# Altium PCB JacdacNRF52833HighPower 32.PcbDoc (part 1 of 2)
Units mil, origin at the board's own origin, x right, y up, seen from the top; angles counter-clockwise.
Board outline 1541.27 x 1415.28 mil, 2 copper layers (Top Layer, Bottom Layer), stack 60.044 mil thick; 63 components, 36 nets, 260 pads, 44 vias.
Unrouted connection lines stored in the file: 13.
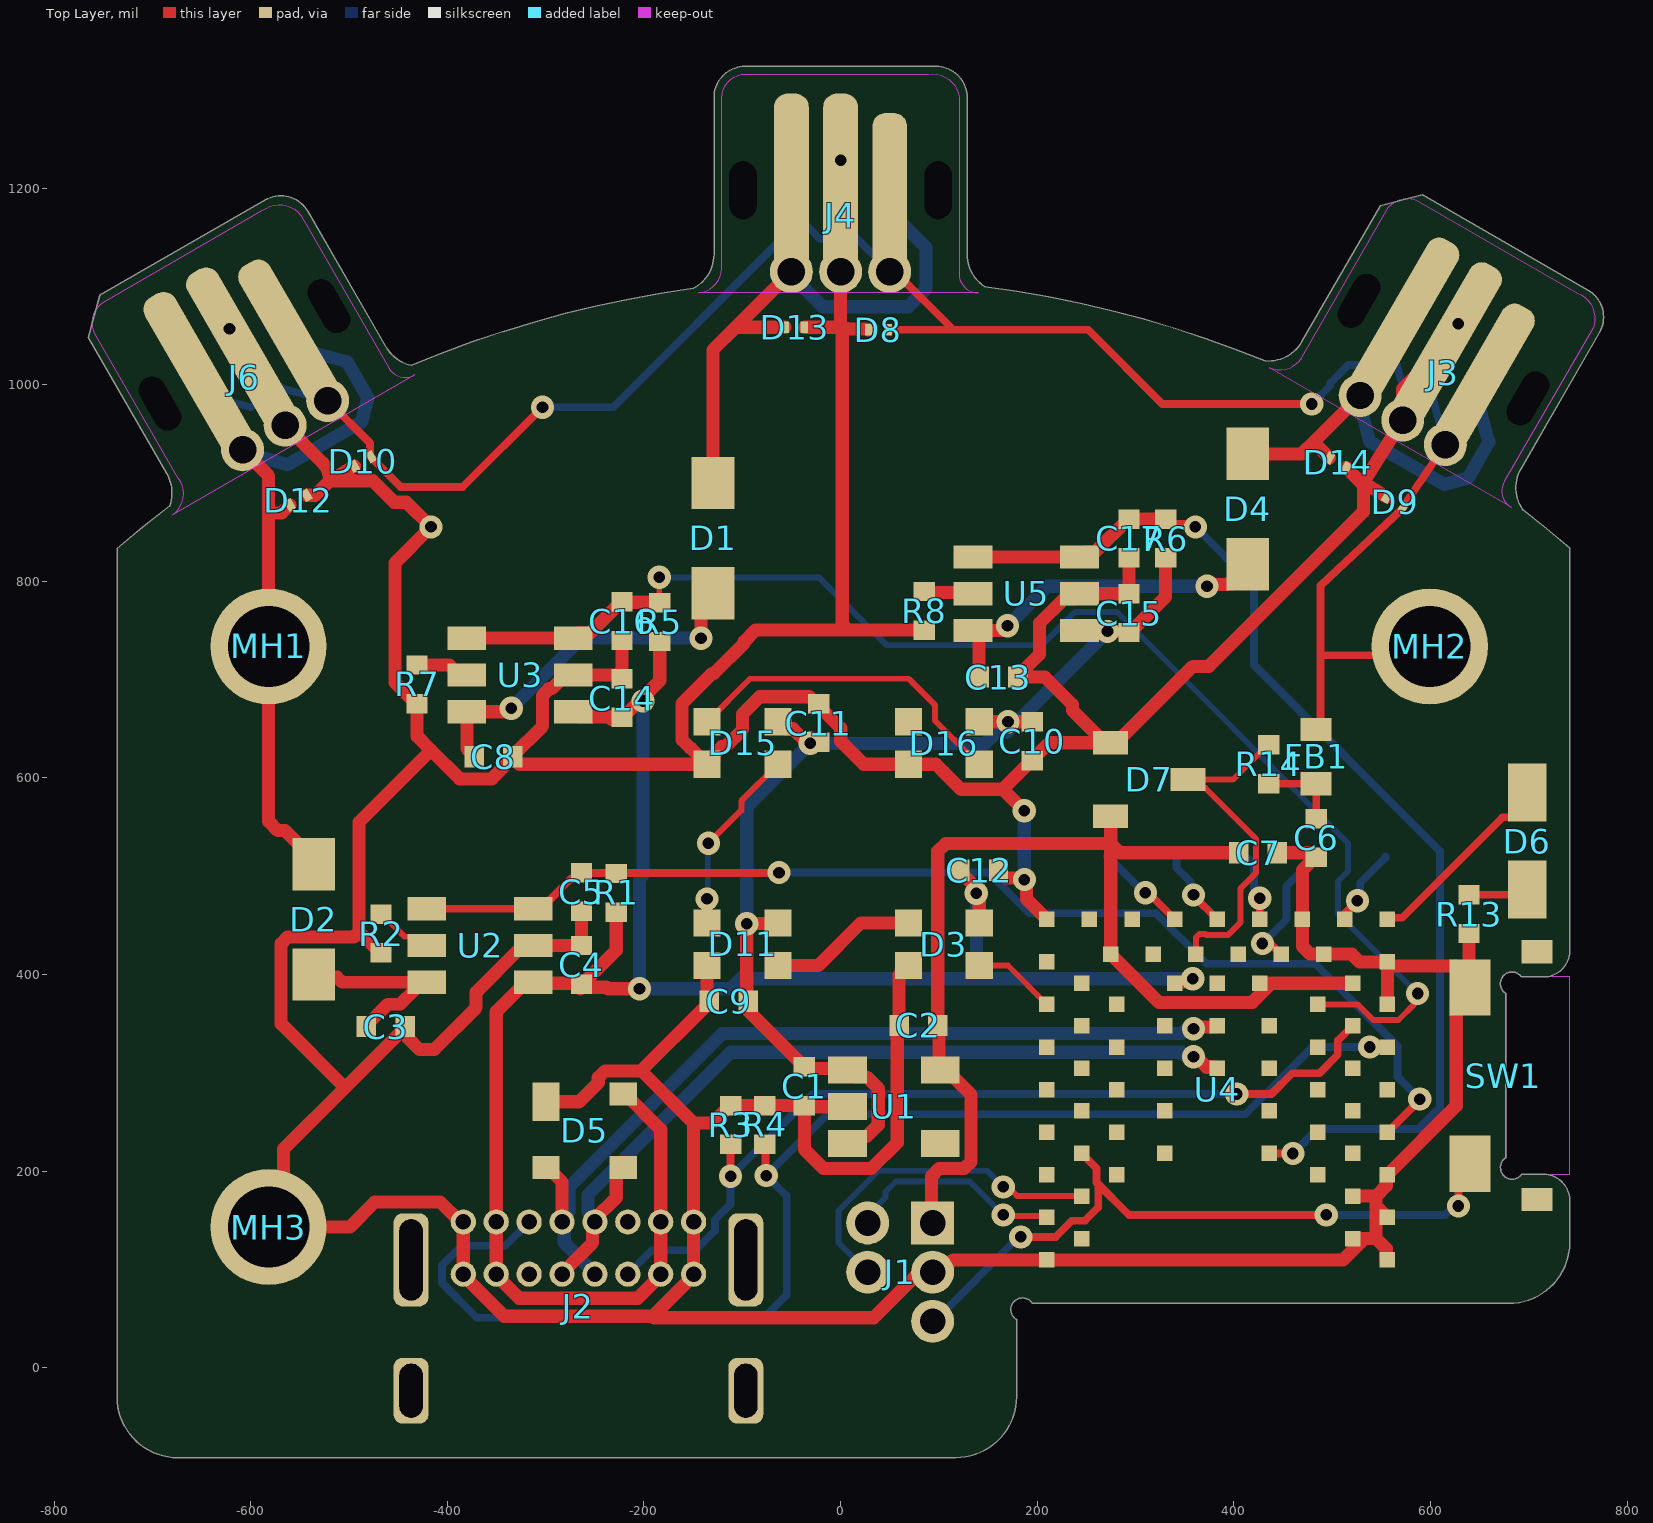
[diagram p0: Top Layer view]
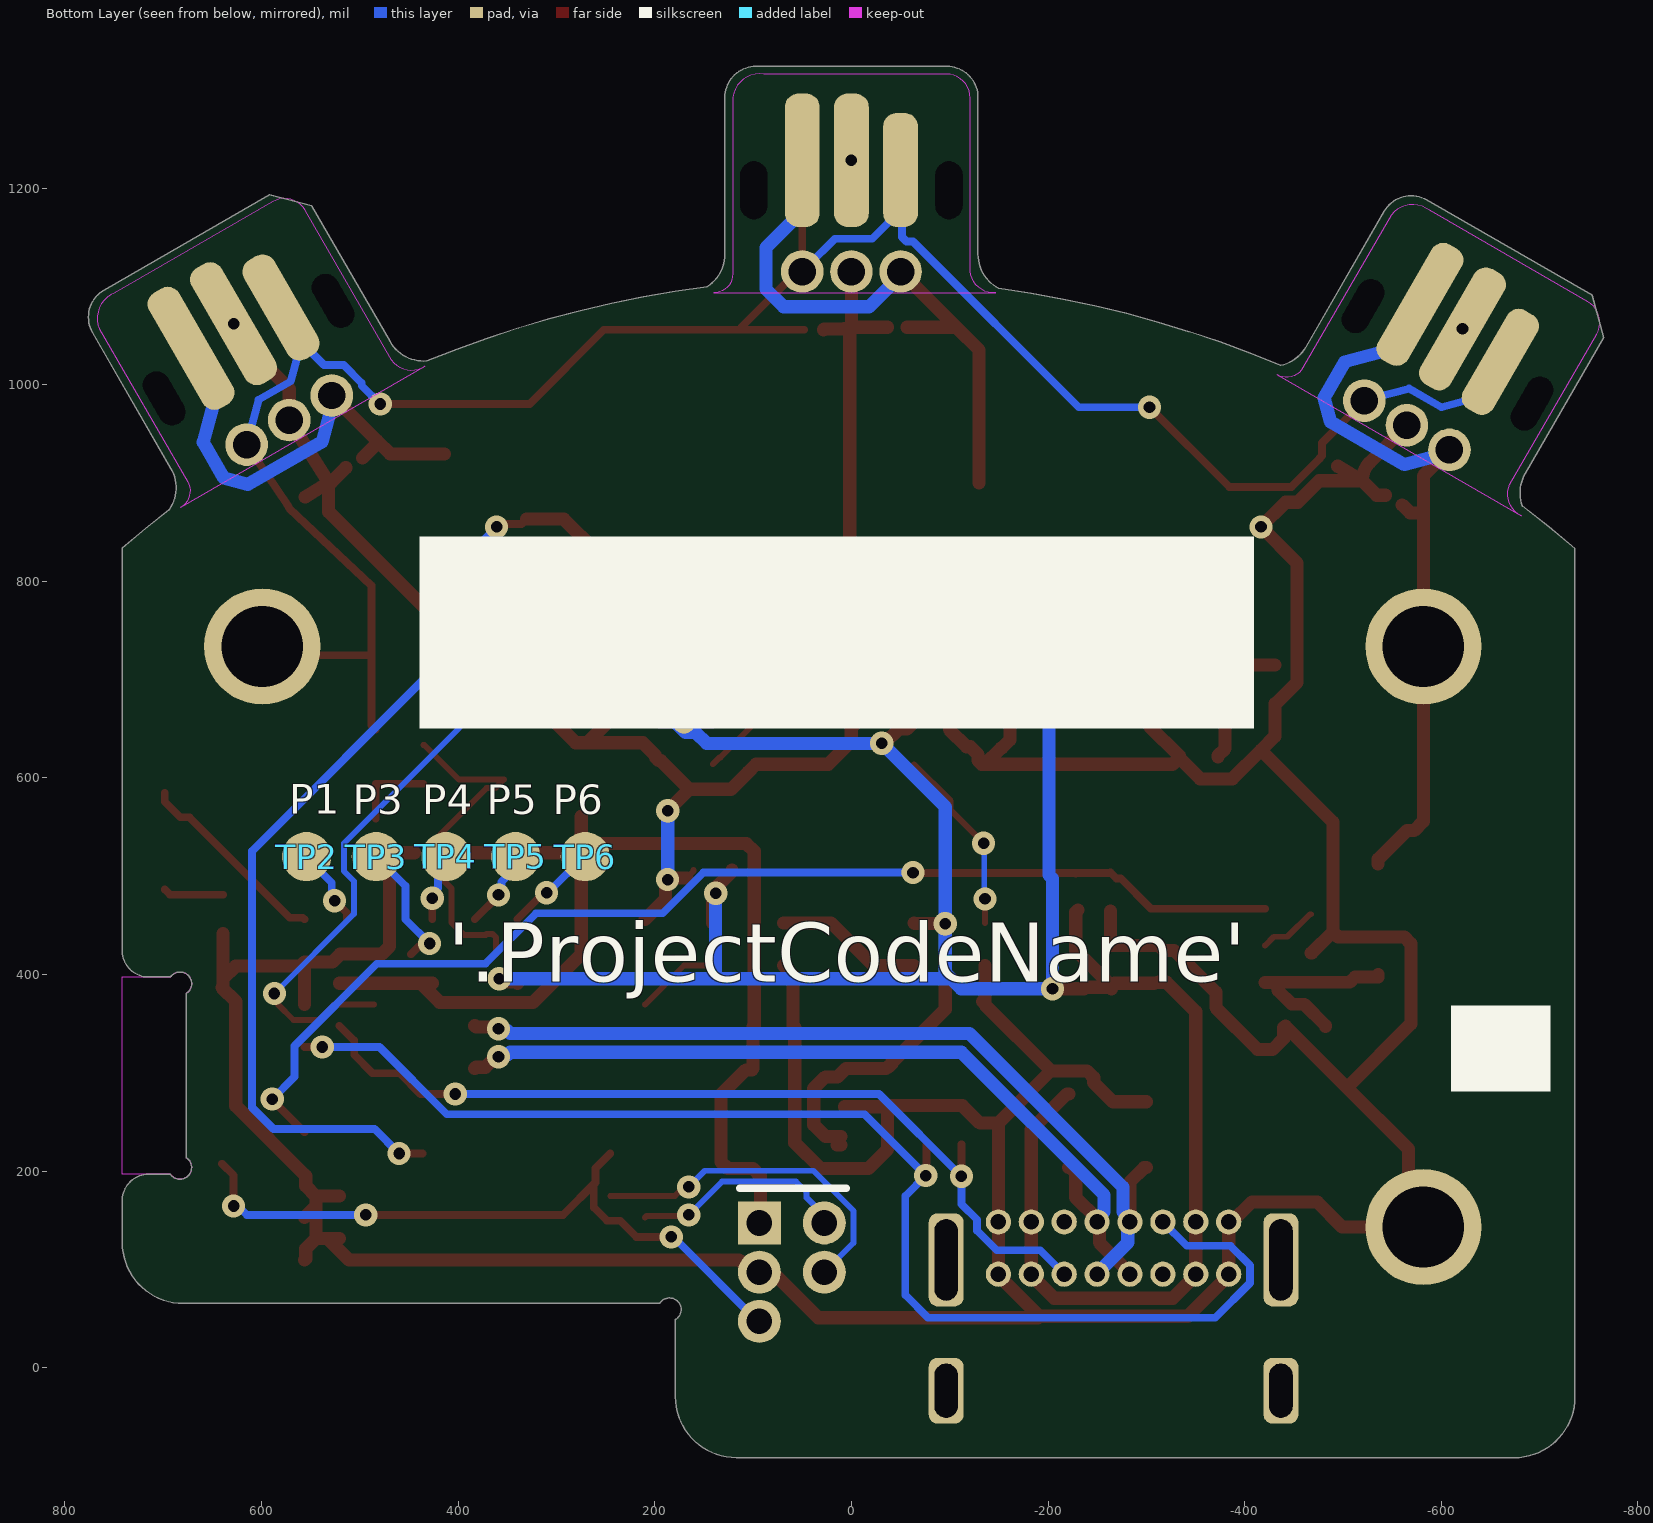
[diagram p1: Bottom Layer view, seen from below]

## Layer stack, top to bottom
Top Solder: solder mask 0.4, Solder Resist, Dk 3.5
Top Layer: signal copper 1.4
Dielectric 1: core 57.2441, FR-4, Dk 4.2
Bottom Layer: signal copper 1.4
Bottom Solder: solder mask 0.4, Solder Resist, Dk 3.5

## Board outline
-735.9,-29.68 -735.91,833.34 cw(c3.15,-26.26) -682.49,876.52 ccw(c-719.49,889.98) -685.39,909.68 -765.11,1047.76 -753.59,1090.79 -585.15,1188.03 cw(c-569.41,1160.75) -542.13,1176.5 -462.41,1038.42 ccw(c-428.31,1058.1) -436.5,1019.59 cw(c2.2,-22.8) -149.93,1097.86 ccw(c-168.12,1132.79) -128.74,1132.8 -128.74,1292.24 cw(c-97.24,1292.24) -97.24,1323.74 97.24,1323.74 cw(c97.24,1292.24) 128.74,1292.24 128.74,1132.8 ccw(c168.11,1132.8) 146.67,1099.78 cw(c1.61,-21.91) 431.7,1024.15 ccw(c435.13,1063.37) 469.22,1043.69 548.95,1181.78 591.97,1193.3 760.4,1096.06 cw(c744.65,1068.78) 771.93,1053.04 692.21,914.95 ccw(c726.3,895.26) 694.05,872.68 cw(c3.29,-22.37) 741.66,833.83 741.65,427.55 cw(c714.74,424.52) 717.78,397.6 692.6,397.5 ccw(c682.93,390.74) 676.67,380.75 676.72,213.69 ccw(c683.07,203.65) 692.83,196.9 717.78,196.71 cw(c714.76,169.79) 741.68,166.76 741.68,127.35 cw(c679.83,127.35) 679.83,65.51 195.02,65.51 ccw(c185.02,59.2) 178.28,49.49 179.04,49.49 179.04,-29.53 cw(c117.19,-29.53) 117.19,-91.38 -674.06,-91.54 cw(c-674.05,-29.69)

## Design rules (kind name [scope] priority, off if disabled: settings)
AssemblyTestPointUsage [All] p1: valid=2
BoardOutlineClearance [All] p1: gap=11.81 ignorepadtopadclearanceinfootprint=FALSE except(0: Arc-SplitContinuation Track-SplitContinuation SMDPad-OutlineEdge SMDPad-SplitContinuation THPad-OutlineEdge THPad-SplitContinuation Via-SplitContinuation Fill-SplitContinuation Poly-SplitContinuation Region-OutlineEdge Region-SplitContinuation Text-SplitContinuation; 7.87: Track-OutlineEdge Text-OutlineEdge)
Clearance [All] p1: gap=4.92 ignorepadtopadclearanceinfootprint=FALSE except(0: Arc-Hole Track-Hole SMDPad-Hole THPad-Hole Via-Hole Fill-Hole Poly-Hole Region-Hole Text-Hole)
ComponentClearance [All] p1: gap=7.87 collisioncheckmode=3 verticalgap=7.87 showdistances=FALSE
DiffPairsRouting [All] p1: maxlimit=78.74 minlimit=5.91 mostfreqgap=5.91 toplayer_minwidth=5.91 toplayer_maxwidth=78.74 toplayer_prefwidth=5.91 bottomlayer_minwidth=5.91 bottomlayer_maxwidth=78.74 bottomlayer_prefwidth=5.91 substack1={CB9D278B-8BF5-444A-AAF4-837A2A9DF42D} toplayer_{cb9d278b-8bf5-444a-aaf4-837a2a9df42d}_minwidth=15 toplayer_{cb9d278b-8bf5-444a-aaf4-837a2a9df42d}_maxwidth=15 toplayer_{cb9d278b-8bf5-444a-aaf4-837a2a9df42d}_prefwidth=15 bottomlayer_{cb9d278b-8bf5-444a-aaf4-837a2a9df42d}_minwidth=15 bottomlayer_{cb9d278b-8bf5-444a-aaf4-837a2a9df42d}_maxwidth=15 bottomlayer_{cb9d278b-8bf5-444a-aaf4-837a2a9df42d}_prefwidth=15 substack2={826B8647-A721-4255-895A-19F9591B9CD1} toplayer_{826b8647-a721-4255-895a-19f9591b9cd1}_minwidth=15 toplayer_{826b8647-a721-4255-895a-19f9591b9cd1}_maxwidth=15 toplayer_{826b8647-a721-4255-895a-19f9591b9cd1}_prefwidth=15 bottomlayer_{826b8647-a721-4255-895a-19f9591b9cd1}_minwidth=15 bottomlayer_{826b8647-a721-4255-895a-19f9591b9cd1}_maxwidth=15 bottomlayer_{826b8647-a721-4255-895a-19f9591b9cd1}_prefwidth=15 substack3={E64FCAF4-1BC8-437D-B1E0-0E5F2DC0F59E} toplayer_{e64fcaf4-1bc8-437d-b1e0-0e5f2dc0f59e}_minwidth=15 toplayer_{e64fcaf4-1bc8-437d-b1e0-0e5f2dc0f59e}_maxwidth=15 toplayer_{e64fcaf4-1bc8-437d-b1e0-0e5f2dc0f59e}_prefwidth=15 bottomlayer_{e64fcaf4-1bc8-437d-b1e0-0e5f2dc0f59e}_minwidth=15 bottomlayer_{e64fcaf4-1bc8-437d-b1e0-0e5f2dc0f59e}_maxwidth=15 bottomlayer_{e64fcaf4-1bc8-437d-b1e0-0e5f2dc0f59e}_prefwidth=15 substack4={E61CE66C-507C-4E1E-8E83-C905434AFC1C} toplayer_{e61ce66c-507c-4e1e-8e83-c905434afc1c}_minwidth=15 toplayer_{e61ce66c-507c-4e1e-8e83-c905434afc1c}_maxwidth=15 toplayer_{e61ce66c-507c-4e1e-8e83-c905434afc1c}_prefwidth=15 bottomlayer_{e61ce66c-507c-4e1e-8e83-c905434afc1c}_minwidth=15 bottomlayer_{e61ce66c-507c-4e1e-8e83-c905434afc1c}_maxwidth=15 bottomlayer_{e61ce66c-507c-4e1e-8e83-c905434afc1c}_prefwidth=15 maxuncoupledlength=984.25
FabricationTestPointUsage [All] p1: valid=2 allowmultiple=FALSE
HoleSize [All] p1: absolutevalues=TRUE maxlimit=100 minlimit=7.87 maxpercent=80.000 minpercent=20.000
MatchedLengths USB_DATA [InDifferentialPair('USB_D')] p1: tolerance=1000 checknetsindiffpair=FALSE checkdiffpairvsdiffpair=TRUE checkxsignals=TRUE checkothers=TRUE
MinimumSolderMaskSliver [All] p1: minsoldermaskwidth=0.2
PlaneClearance [All] p1: clearance=11.81
PlaneConnect [All] p1: planeconnectstyle=Relief reliefexpansion=19.68 reliefentries=4 reliefconductorwidth=7.87 reliefairgap=11.81
PolygonConnect "PolygonConnect GND" [isVIA] p1: connectstyle=Relief reliefconductorwidth=7.87 reliefentries=4 polygonreliefangle="90 Angle" airgapwidth=7.87
PolygonConnect [All] p2: connectstyle=Relief reliefconductorwidth=7.87 reliefentries=4 polygonreliefangle="90 Angle" airgapwidth=7.87
RoutingVias [All] p1: holewidth=11.81 width=23.62 viastyle="Through Hole" minholewidth=11.81 minwidth=23.62 maxholewidth=11.81 maxwidth=31.5
SignalStimulus "Schematic Signal Stimulus_1" [InNet('USB_D_P')] p1: kind=1 level=1 starttime=0.000 stoptime=500.0m periodtime=1.000
SignalStimulus "Schematic Signal Stimulus" [InNet('USB_D_N')] p2: kind=1 level=1 starttime=0.000 stoptime=41.67n periodtime=83.33n
SilkToSilkClearance [All] p1: silktosilkclearance=0.04
SilkToSolderMaskClearance [IsPad] p1: minsilkscreentomaskgap=1.97 clearancetoexposedcopper=TRUE
SolderMaskExpansion TENTED_VIA [IsVia] p1: expansion=4 istentingtop=TRUE
SolderMaskExpansion [All] p2: expansion=2.95 istentingtop=FALSE
Width [All] p1: maxlimit=78.74 minlimit=6 preferedwidth=6 substack1={CB9D278B-8BF5-444A-AAF4-837A2A9DF42D} toplayer_{cb9d278b-8bf5-444a-aaf4-837a2a9df42d}_minwidth=5.91 toplayer_{cb9d278b-8bf5-444a-aaf4-837a2a9df42d}_prefwidth=5.91 bottomlayer_{cb9d278b-8bf5-444a-aaf4-837a2a9df42d}_minwidth=5.91 bottomlayer_{cb9d278b-8bf5-444a-aaf4-837a2a9df42d}_prefwidth=5.91 substack2={826B8647-A721-4255-895A-19F9591B9CD1} toplayer_{826b8647-a721-4255-895a-19f9591b9cd1}_minwidth=5.91 toplayer_{826b8647-a721-4255-895a-19f9591b9cd1}_prefwidth=5.91 bottomlayer_{826b8647-a721-4255-895a-19f9591b9cd1}_minwidth=5.91 bottomlayer_{826b8647-a721-4255-895a-19f9591b9cd1}_prefwidth=5.91 substack3={E64FCAF4-1BC8-437D-B1E0-0E5F2DC0F59E} toplayer_{e64fcaf4-1bc8-437d-b1e0-0e5f2dc0f59e}_minwidth=5.91 toplayer_{e64fcaf4-1bc8-437d-b1e0-0e5f2dc0f59e}_prefwidth=5.91 bottomlayer_{e64fcaf4-1bc8-437d-b1e0-0e5f2dc0f59e}_minwidth=5.91 bottomlayer_{e64fcaf4-1bc8-437d-b1e0-0e5f2dc0f59e}_prefwidth=5.91 substack4={E61CE66C-507C-4E1E-8E83-C905434AFC1C} toplayer_{e61ce66c-507c-4e1e-8e83-c905434afc1c}_minwidth=5.91 toplayer_{e61ce66c-507c-4e1e-8e83-c905434afc1c}_prefwidth=5.91 bottomlayer_{e61ce66c-507c-4e1e-8e83-c905434afc1c}_minwidth=5.91 bottomlayer_{e61ce66c-507c-4e1e-8e83-c905434afc1c}_prefwidth=5.91 minimp=50.000000 maximp=50.000000 favimp=50.000000
20 further rules are at their usual default settings.

## Classes and differential pairs
differential pair USB_D: +USB_D_P -USB_D_N

## Components (designator, comment, footprint, x,y, rotation, side; value= is the part's Value field where it differs from the comment)
C1 "CL05A105KP5NNNC" "C0402_0.55MM - without outline" -36.86,286.36 r90 top
C2 "CL05A105KP5NNNC" "C0402_0.55MM - without outline" 79.23,348.22 r0 top
C3 "CL05A475MP5NRNC" "R0402 - Without outline" -462.62,347.07 r180 top
C4 "CL05A475MP5NRNC" "R0402 - Without outline" -263.64,409.88 r270 top
C5 "CL05A475MP5NRNC" "R0402 - Without outline" -263.64,483.99 r90 top
C6 "CL05C330JB51PNC" "C0402_0.55MM - without outline" 483.76,538.93 r90 top
C7 "CL05A475MP5NRNC" "R0402 - Without outline" 424.67,523.79 r180 top
C8 "CL05A475MP5NRNC" "R0402 - Without outline" -353.09,621.48 r180 top
C9 "CL05B104KP5NNNC" "C0402_0.55MM - without outline" -113.75,372.7 r0 top
C10 "CL05B104KP5NNNC" "C0402_0.55MM - without outline" 195.02,637.27 r90 top
C11 "CL05B104KP5NNNC" "C0402_0.55MM - without outline" -22.28,655.81 r270 top
C12 "CL05B104KP5NNNC" "C0402_0.55MM - without outline" 141.03,506.17 r180 top
C13 "CL05A475MP5NRNC" "R0402 - Without outline" 160.57,702.53 r180 top
C14 "CL05A475MP5NRNC" "R0402 - Without outline" -222.32,681.27 r270 top
C15 "CL05A475MP5NRNC" "R0402 - Without outline" 293.46,767.62 r270 top
C16 "CL05A475MP5NRNC" "R0402 - Without outline" -222.32,759.46 r90 top
C17 "CL05A475MP5NRNC" "R0402 - Without outline" 293.46,843.52 r90 top
D1 "MBR120VLSFT3G" MBR120VLSFT3G -129.76,843.82 r270 top
D2 "MBR120VLSFT3G" MBR120VLSFT3G -535.79,456.15 r270 top
D3 "WS2812B-2020" WS2812B-2020 105,430.77 r180 top
D4 "MBR120VLSFT3G" MBR120VLSFT3G 414.03,873.5 r270 top
D5 "NXP-PRTR5V0U2X,215-4-whitesch" NXP-SOT143B-4_V -260.47,241.05 r0 top
D6 "Right angle mount LED (orange)" LTST-S220KFKT 698.49,486.56 r0 top
D7 "BAT54S" NXP-BAT54S-TO-236AB 314.09,598.35 r0 top
D8 "VBUS05B1-SD0-G4-08" "0201-VBUS05B1-SD0-G4-08 - Without outline" 38.4,1055.78 r180 top
D9 "VBUS05B1-SD0-G4-08" "0201-VBUS05B1-SD0-G4-08 - Without outline" 564.09,880.71 r150 top
D10 "VBUS05B1-SD0-G4-08" "0201-VBUS05B1-SD0-G4-08 - Without outline" -486.22,921.88 r210 top
D11 "WS2812B-2020" WS2812B-2020 -99.72,430.77 r180 top
D12 "VBUS05B1-SD0-G4-08" "0201-VBUS05B1-SD0-G4-08 - Without outline" -551.66,882.61 r30 top
D13 "VBUS05B1-SD0-G4-08" "0201-VBUS05B1-SD0-G4-08 - Without outline" -46.7,1058.44 r0 top
D14 "VBUS05B1-SD0-G4-08" "0201-VBUS05B1-SD0-G4-08 - Without outline" 505.81,920.5 r330 top
D15 "WS2812B-2020" WS2812B-2020 -99.72,635.49 r180 top
D16 "WS2812B-2020" WS2812B-2020 105,635.49 r180 top
FB1 "TDK MPZ1608S102ATA00" "TDK MPZ1608 0.8mm - without outline" 483.76,621.56 r270 top
J1 "Hack Connect Mini 1.27 mm pitch 2-row" HACK_CONNECT_MINI_5_X_1_27 93.61,147.26 r180 top
J2 "USB4085-GF-A" USB4085-GF-A -266.61,95.17 r0 top
J3 "JACDAC edge connector" JACDAC_EDGE_CONNECTOR_0.2mm_T&G 561.03,945.22 r330 top
J4 "JACDAC edge connector" JACDAC_EDGE_CONNECTOR_0.2mm_T&G 0,1093.43 r0 top
J6 "JACDAC edge connector" JACDAC_EDGE_CONNECTOR_0.2mm_T&G -554.21,939.95 r30 top
MH1 "MH_5.0MMK_3.0MMC_2.1MMD_PTH" MH_5.0MMK_3.0MMC_2.1MMD_PTH -581.79,733.67 r90 top
MH2 "MH_5.0MMK_3.0MMC_2.1MMD_PTH" MH_5.0MMK_3.0MMC_2.1MMD_PTH 599.29,733.67 r90 top
MH3 "MH_5.0MMK_3.0MMC_2.1MMD_PTH" MH_5.0MMK_3.0MMC_2.1MMD_PTH -581.79,143.11 r270 top
R1 "" "R0402 - Without outline" -228.19,483.1 r90 top
R2 "0402 RES SMD 30k 1%" R0402 -467.44,441.67 r90 top
R3 "RC0402JR-075K1L" "R0402 - Without outline" -111.84,246.99 r90 top
R4 "RC0402JR-075K1L" "R0402 - WITHOUT OUTLINE" -77.17,246.99 r90 top
R5 "" "R0402 - WITHOUT OUTLINE" -183.91,758.48 r90 top
R6 "" "R0402 - Without outline" 330.67,843.49 r90 top
R7 "0402 RES SMD 30k 1%" R0402 -430.76,695.1 r90 top
R8 "0402 RES SMD 30k 1%" R0402 85.23,769.98 r90 top
R13 "RC0402FR-071KL" "R0402 - Without outline" 639.27,461.45 r90 top
R14 "RC0402FR-07220RL" "R0402 - Without outline" 435.5,613.86 r270 top
SW1 "Side mount digital switch." EVQ-P42B3M 741.68,297.11 r90 top
TP2 "TestPoint" Pad1.27mm 554.18,519.93 r180 bottom
TP3 "TestPoint" Pad1.27mm 483.31,519.93 r180 bottom
TP4 "TestPoint" Pad1.27mm 412.44,519.93 r180 bottom
TP5 "TestPoint" Pad1.27mm 341.58,519.93 r180 bottom
TP6 "TestPoint" Pad1.27mm 270.71,519.93 r180 bottom
U1 "LDO 3.3V/300 mA" ON_SEMI-SOT23-5 54.2,265.58 r0 top
U2 "TPS2553DBVR_ALT" TI-TPS2553 -366.71,429.57 r180 top
U3 "TPS2553DBVR_ALT" TI-TPS2553 -326,704.75 r180 top
U4 "Fanstel Nordic NRF52833 module" BM833 383.09,202.21 r180 top
U5 "TPS2553DBVR_ALT" TI-TPS2553 188.87,787.41 r180 top

## Footprints (in the part's own frame and the unit in brackets; to place one, negate y for a bottom-side part, rotate by r counter-clockwise, add the part's x,y. Pads: shape width x height; smd on the part's side, far side on the other; paste and mask are expansions set on the pad)
"0201-VBUS05B1-SD0-G4-08 - Without outline" [mm]
  rect 0.2x0.3 smd mask+0.05: 1(-0.25,0) 2(0.25,0)
  body extent -0.3,-0.15 0.3,0.15, height 0.22
BM833 [mm]
  rect 0.4x0.4 smd paste-0.254: 1(-4.4,2.35) 2(-3.5,1.8) 3(-4.4,1.25) 4(-3.5,0.7) 5(-4.4,0.15) 6(-3.5,-0.4) 7(-4.4,-0.95) 8(-3.5,-1.5) 9(-4.4,-2.05) 10(-3.5,-2.6) 11(-4.4,-3.15) 12(-3.5,-3.7) 13(-4.4,-4.25) 14(-3.5,-4.8) 15(-4.4,-5.35) 16(-4.4,-6.45) 17(-3.3,-6.45) 18(-2.75,-5.55) 19(-2.2,-6.45) 20(-1.65,-5.55) 21(-1.1,-6.45) 22(-0.55,-5.55) 23(0,-6.45) 24(0.55,-5.55) 25(1.1,-6.45) 26(1.65,-5.55) 27(2.2,-6.45) 28(2.75,-5.55) 29(3.3,-6.45) 30(4.4,-6.45) 31(4.4,-5.35) 32(3.5,-4.8) 33(4.4,-4.25) 34(3.5,-3.7) 35(4.4,-3.15) 36(3.5,-2.6) 37(4.4,-2.05) 38(3.5,-1.5) 39(4.4,-0.95) 40(3.5,-0.4) 41(4.4,0.15) 42(3.5,0.7) 43(4.4,1.25) 44(3.5,1.8) 45(4.4,2.35) 46(1.35,-0.4) 47(-1.35,-0.4) 48(-2.6,0.15) 49(-2.6,-0.95) 50(-1.35,-1.5) 51(-2.6,-2.05) 52(-1.35,-2.6) 53(-2.6,-3.15) 54(-1.35,-3.7) 55(-2.6,-4.25) 56(-1.1,-4.8) 57(0,-4.8) 58(1.1,-4.8) 59(2.6,-4.25) 60(1.35,-3.7) 61(2.6,-3.15) 62(1.35,-2.6) 63(2.6,-2.05) 64(1.35,-1.5) 65(2.6,-0.95) 66(2.6,0.15) 67(0,-3.7) 68(0,-2.6)
  body extent -5.1,-7.3 5.1,7.5, height 2
"C0402_0.55MM - without outline" [mm]
  rect 0.5x0.55 smd: 1(-0.5,0) 2(0.5,0)
  body extent -0.5,-0.25 0.5,0.25, height 0.55
EVQ-P42B3M [mm] "side mount tactile switch"
  rect 1.45x1.05 smd paste-0.254: 1(-2.275,2.575) 2(2.275,2.575)
  rect 0.6x0.8 smd paste-0.254: 3(-3.2,0.85) 4(3.2,0.85)
  Keep-Out Layer board cut-out: -2.55,0 2.55,0 2.55,1.226 2.551,1.247 2.649,1.361 2.678,1.508 2.633,1.651 2.524,1.755 2.379,1.792 2.233,1.755 2.124,1.651 2.124,1.651 -2.114,1.65 -2.224,1.755 -2.371,1.792 -2.519,1.754 -2.629,1.65 -2.674,1.505 -2.644,1.356 -2.545,1.241 -2.545,1.241 -2.55,1.214
  body extent -3.1,-0.52 3.1,2.48, height 1.32
HACK_CONNECT_MINI_5_X_1_27 [mm]
  rect 1.11x1.11 hole 0.66: 1(0,0)
  round 1.11 hole 0.66: 2(1.676,0) 3(0,1.27) 4(1.676,1.27) 5(0,2.54)
JACDAC_EDGE_CONNECTOR_0.2mm_T&G [mm] "JacDac 3 pin connector with traces for 0.2mm T&G"
  rrect78% 0.9x2.95 smd far side paste-1 mask+0: 1(-1.27,3.175)
  rrect78% 0.9x4.3 smd paste-1 mask+0: 1(1.27,2.5)
  round 1.11 / inner round 0.71 / far side round 1.1 hole 0.71 paste-0.254 mask+0: 1(1.27,0.55) 2(0,0.55) 3(-1.27,0.55)
  rrect78% 0.9x4.8 smd paste-1 mask+0: 2(0,2.75) 3(-1.27,2.75)
  rrect78% 0.9x3.45 smd far side paste-1 mask+0: 2(0,3.425) 3(1.27,3.425)
  round 0 hole 0.7 slot 1.5 at 90 deg unplated: ""(-2.52,2.65) ""(2.52,2.65)
  Top Layer keep-out region: -3.663,0 -3.413,0.079 -3.213,0.248 -3.092,0.48 -3.07,0.741 -3.07,0.741 -3.07,5.033 -2.987,5.341 -2.761,5.567 -2.453,5.65 -2.453,5.65 2.27,5.65 2.545,5.635 2.794,5.516 2.978,5.31 3.07,5.05 3.07,5.05 3.061,0.495 3.098,0.306 3.206,0.145 3.366,0.038 3.556,0 3.556,0
  Top Layer keep-out region: -3.663,0 -3.413,0.079 -3.213,0.248 -3.092,0.48 -3.07,0.741 -3.07,0.741 -3.07,5.033 -2.987,5.341 -2.761,5.567 -2.453,5.65 -2.453,5.65 2.27,5.65 2.545,5.635 2.794,5.516 2.978,5.31 3.07,5.05 3.07,5.05 3.061,0.495 3.098,0.306 3.206,0.145 3.366,0.038 3.556,0 3.556,0
  Bottom Layer lines w0.2: -1.27,0.85 -1.126,0.85 ; -1.307,2.167 -0.54,1.4 0.426,1.4 1.126,0.7 ; -1.067,2.077 -1.067,2.153
  Bottom Layer lines w0.34: -1.27,0.454 -0.457,-0.359 1.753,-0.359 2.21,0.098 2.21,1.165 1.283,2.092
  Bottom Layer keep-out region: -3.731,0 -3.494,0.027 -3.285,0.142 -3.136,0.329 -3.07,0.559 -3.07,0.559 -3.07,5.033 -3.023,5.269 -2.889,5.469 -2.689,5.603 -2.453,5.65 -2.453,5.65 2.27,5.65 2.545,5.635 2.794,5.516 2.978,5.31 3.07,5.05 3.07,5.05 3.07,0.487 3.107,0.301 3.213,0.143 3.371,0.037 3.557,0 3.557,0
LTST-S220KFKT [mm] "Right angle SMD LED (Orange)"
  rect 1x1.5 smd paste-0.254: 1(0,0) 2(0,2.5)
  body extent -0.16,0.22 0.89,2.32, height 0.6
MBR120VLSFT3G [mm] "SODFL, 2-Leads, Body 1.65x3.60mm, IPC Medium Density"
  rect 1.35x1.1 smd: 1(-1.425,0) 2(1.425,0)
  body extent -1.73,-0.82 1.72,0.82, height 0.95
MH_5.0MMK_3.0MMC_2.1MMD_PTH [mm] "Mounting Hole 5.0mm clearance, 3.1 annualar ring and 2.1mm PTH"
  round 3 hole 2.1 mask+0.05: 1(0,0)
NXP-BAT54S-TO-236AB [mm] "SOT23, 3-Leads, Body 2.90x2.30mm, Pitch 0.95mm, IPC Medium Density"
  rect 0.9x0.6 smd: 1(-1,0.95) 2(-1,-0.95) 3(1,0)
  body extent -1.32,-1.5 1.32,1.5, height 1.12
NXP-SOT143B-4_V [mm] "SOT143, 4-Leads, Body 3x1.4mm"
  rect 0.7x1 smd: 1(-1,0.75)
  rect 0.7x0.6 smd: 2(-1,-0.95) 3(1,-0.95) 4(1,0.95)
  body extent -1.17,-1.48 1.17,1.48, height 1.08
ON_SEMI-SOT23-5 [mm]
  rect 1x0.7 smd: 1(-1.2,0.95) 2(-1.2,0) 3(-1.2,-0.95) 4(1.2,-0.95) 5(1.2,0.95)
  body extent -1.5,-1.57 1.5,1.58, height 1.1
Pad1.27mm [mil] "1.27mm dia round pad"
  round 50 smd paste-100: 1(0,0)
R0402 [mm]
  rect 0.5x0.55 smd: 1(-0.5,0) 2(0.5,0)
  body extent -0.5,-0.25 0.5,0.25, height 0.35
"R0402 - Without outline" [mm]
  rect 0.5x0.55 smd: 1(-0.5,0) 2(0.5,0)
  body extent -0.5,-0.25 0.5,0.25, height 0.35
"R0402 - WITHOUT OUTLINE" [mm]
  rect 0.5x0.55 smd: 1(-0.5,0) 2(0.5,0)
  body extent -0.5,-0.25 0.5,0.25, height 0.35
"TDK MPZ1608 0.8mm - without outline" [mm]
  rect 0.6x0.8 smd paste-0.1: 1(-0.7,0) 2(0.7,0)
  body extent -0.8,-0.4 0.8,0.4, height 0.8
TI-TPS2553 [mm] "SOT23, 6-Leads, Body 2.90x2.80mm, Pitch 0.95mm, IPC Medium Density"
  rect 1x0.6 smd: 1(-1.375,0.95) 2(-1.375,0) 3(-1.375,-0.95) 4(1.375,-0.95) 5(1.375,0) 6(1.375,0.95)
  body extent -1.52,-1.52 1.53,1.53, height 1.1
USB4085-GF-A [mm] "16 contact USB C connector. Ideal for connecting USB 2.0 microcontrollers that reuqire comms."
  rrect50% 0.9x1.7 hole 1.4 slot 0.6 at 0 deg paste-0.254: 1(-4.325,-3.01) 4(4.325,-3.01)
  rrect50% 0.9x2.4 hole 2.1 slot 0.6 at 0 deg paste-0.254: 2(-4.325,0.37) 3(4.325,0.37)
  round 0.65 hole 0.4 paste-0.254: A1(-2.975,1.35) A4(-2.125,1.35) A5(-1.275,1.35) A6(-0.425,1.35) A7(0.425,1.35) A8(1.275,1.35) A9(2.125,1.35) A12(2.975,1.35) B1(2.975,0) B4(2.125,0) B5(1.275,0) B6(0.425,0) B7(-0.425,0) B8(-1.275,0) B9(-2.125,0) B12(-2.975,0)
  body extent -4.52,-7.26 4.51,1.93, height 3.39
WS2812B-2020 [mm] "2.0mm x 2.0mm RGB LED (Neopixel)"
  rect 0.7x0.7 smd paste-0.254: 1(0.915,-0.55) 2(0.915,0.55) 3(-0.915,0.55) 4(-0.915,-0.55)
  body extent -1,-1 1,1, height 0.54

## Part data
C1 C2: "CAP CER 1UF 10V X5R 0402", Capacitance=1µF, Case Code (Imperial)=0402, Case Code (Metric)=1005, Dielectric=X5R, Manufacturer=Samsung, Max Operating Temperature=85°C, Min Operating Temperature=-55°C, Package Quantity=1, Supplier Part Number 1=1276-1076-1-ND, Tolerance=10%, Voltage Rating=10V, Case/Package=0402, Category=Capacitors, Checked=?, ComponentLink1Description="Online datasheet", ComponentLink1URL=https://datasheet.ciiva.com/15195/getdatasheetpartid-358390-15195630.pdf, Contact Plating=Tin, Created=DG, Depth=0.5mm, Height=0.5mm, Length=1mm, Manufacturer Part Number=CL05A105KP5NNNC, Material=Ceramic, Mount="Surface Mount", Packaging="Tape and Reel", Pricing 1="1=0.10000, 10=0.03900, 50=0.02100, 100=0.01720, 500=0.01228, 1000=0.00965, 2500=0.00877, 5000=0.00807 (USD)", Pricing 2="1=0.10000, 10=0.04200, 100=0.01800, 500=0.01300, 1000=0.01000, 2500=0.00900 (USD)", Pricing 3="10=0.02450, 100=0.02000, 500=0.01310, 2500=0.00920, 5000=0.00810, 10000=0.00640, 50000=0.00490 (GBP)", Radiation Hardening=No, RoHS=Yes, Stock 1=5705569, Stock 2=928941, Stock 3=53670, Supplier 1=Digi-Key, Supplier 2=Mouser, Supplier 3=Farnell, Supplier Part Number 2=187-CL05A105KP5NNNC, Supplier Part Number 3=3013329, Thickness=0.022inch, Width=0.02inch
C3 C4 C5 C7 C8 C13 C14 C15 C16 C17: "CAP CER 4.7UF 10V X5R 0402", Capacitance=4.7uF, Case Code (Imperial)=0402, Case Code (Metric)=1005, Dielectric=X5R, Manufacturer=Samsung, Max Operating Temperature=85°C, Min Operating Temperature=-55°C, Package Quantity=10000, Supplier Part Number 1=1276-1482-2-ND, Tolerance=20%, Voltage Rating=10V, Case/Package=0402, Category="Ceramic Capacitors", Checked By=?, ComponentLink1Description="Online datasheet", ComponentLink1URL=https://datasheet.ciiva.com/25786/cl05a475mp5nrnc-25786963.pdf, Created By="D. Gakure", Lead Free="Lead Free", Length=0.039inch, Manufacturer Part Number=CL05A475MP5NRNC, Mount="Surface Mount", Packaging="Tape and Reel", Pricing 1="10000=0.01405, 20000=0.01338 (USD)", Pricing 2="1=0.23500, 500=0.03970, 1500=0.02900, 2500=0.02500, 5000=0.02050 (USD)", RoHS=Yes, RoHS Compliant=Yes, Series=CL, Stock 1=840000, Stock 2=2004, Supplier 1=Digi-Key, Supplier 2="Future Electronics", Supplier Part Number 2=2103694, Thickness=0.022inch, Width=0.02inch
C6: "CAP CER 33PF 50V NP0 0402", Capacitance=33pF, Case Code (Imperial)=0402, Case Code (Metric)=1005, Manufacturer=Samsung, Max Operating Temperature=125°C, Min Operating Temperature=-55°C, Ratings=AEC-Q200, Supplier Part Number 1=1276-6515-1-ND, Tolerance=5%, Voltage Rating=50V, Case/Package=0402, Category=Capacitors, Checked=?, ComponentLink1Description="Samsung datasheet online", ComponentLink1URL=http://www.samsungsem.com/kr/support/library/product-catalog/mlcc.jsp, Created=DG, Lead Free="Lead Free", Length=0.039inch, Manufacturer Part Number=CL05C330JB51PNC, Mount="Surface Mount", Packaging="Tape and Reel", Pricing 1="1=0.10000, 10=0.07500, 50=0.04060, 100=0.03320, 500=0.02374, 1000=0.01865, 2500=0.01696, 5000=0.01560 (USD)", Pricing 2="1=0.11000, 10=0.08200, 100=0.03600, 500=0.02600, 1000=0.02000, 2500=0.01800 (USD)", Pricing 3="10000=0.00780 (USD)", RoHS=Yes, Stock 1=250654, Stock 2=97900, Stock 3=100000, Supplier 1=Digi-Key, Supplier 2=Mouser, Supplier 3="Future Electronics", Supplier Part Number 2=187-CL05C330JB51PNC, Supplier Part Number 3=6022520, Thickness=0.022inch, Width=0.02inch
C9 C10 C11 C12: "CAP CER 0.1UF 10V X7R 0402", Capacitance=100nF, Case Code (Imperial)=0402, Case Code (Metric)=1005, Dielectric=X7R, Manufacturer=Samsung, Max Operating Temperature=125°C, Min Operating Temperature=-55°C, Package Quantity=1, Supplier Part Number 1=1276-1002-1-ND, Tolerance=10%, Voltage Rating=10V, Case/Package=0402, Category="Ceramic Capacitors", Checked=?, ComponentLink1Description="Samsung datasheet online", ComponentLink1URL=https://datasheet.ciiva.com/15165/getdatasheetpartid-37100-15165107.pdf, Contact Plating=Tin, Created=DG, Depth=0.5mm, Height=0.5mm, Length=1mm, Manufacturer Part Number=CL05B104KP5NNNC, Mount="Surface Mount", Packaging="Tape and Reel", Pricing 1="1=0.10000, 10=0.02500, 50=0.01380, 100=0.01130, 500=0.00804, 1000=0.00632, 2500=0.00575, 5000=0.00529 (USD)", Pricing 2="10000=0.00400, 20000=0.00400, 50000=0.00400 (USD)", Pricing 3="10=0.01620, 100=0.01310, 500=0.00740, 2500=0.00600, 5000=0.00470, 10000=0.00400, 50000=0.00320 (GBP)", Pricing 4="1=0.09000, 25=0.02300, 100=0.01000, 250=0.00900, 500=0.00700, 1000=0.00500, 2500=0.00500 (USD)", Pricing 5="1=0.00460, 500=0.00340, 1500=0.00320, 2500=0.00310, 5000=0.00300 (USD)", Radiation Hardening=No, RoHS=Yes, Stock 1=17321183, Stock 2=984124, Stock 3=39022, Stock 4=56730, Stock 5=20877033, Supplier 1=Digi-Key, Supplier 2=Mouser, Supplier 3=Farnell, Supplier 4=Newark, Supplier 5="Future Electronics", Supplier Part Number 2=187-CL05B104KP5NNNC, Supplier Part Number 3=3013351, Supplier Part Number 4=82AC9219, Supplier Part Number 5=9032525, Thickness=0.022inch, Width=0.02inch
D1 D2 D4: "DIODE SCHOTTKY 20V 1A SOD123FL", Average Rectified Current=1A, Forward Voltage=340mV, Manufacturer="ON Semiconductor", Max Forward Surge Current (Ifsm)=45A, Max Operating Temperature=125°C, Max Repetitive Reverse Voltage (Vrrm)=20V, Max Reverse Leakage Current=600uA, Min Operating Temperature=-65°C, Package Quantity=10000, Supplier Part Number 1=MBR120VLSFT3GOSCT-ND, Category="Schottky Diodes", ComponentLink4Description="On Semi datasheet online", ComponentLink4URL=https://datasheet.ciiva.com/6380/mbr120vlsft1-d-6380910.pdf, Current Rating=1A, Element Configuration=Single, Forward Current=1A, Halogen Free="Halogen Free", Lead Free="Lead Free", Manufacturer Part Number=MBR120VLSFT3G, Max Reverse Voltage (DC)=20V, Max Surge Current=45A, Number of Pins=2, Output Current=1A, Packaging="Tape and Reel", Peak Non-Repetitive Surge Current=45A, Peak Reverse Current=600uA, Polarity=Standard, Pricing 1="1=0.39000, 10=0.28600, 100=0.19920, 500=0.12616, 1000=0.10292, 2000=0.09960, 5000=0.09628 (USD)", Radiation Hardening=No, REACH SVHC="No SVHC", RoHS=Yes, Stock 1=32481, Supplier 1=Digi-Key, Supplier 2=Mouser, Supplier 3=RSComponents, Supplier Part Number 2=863-MBR120VLSFT3G, Supplier Part Number 3=1867479, Voltage Rating (DC)=20V
D3 D11 D15 D16: "WS2812B RGB LED (Neopixel) 2.0mm x 2.0mm", ComponentLink1Description="datasheet (offline)", ComponentLink1URL="Y:\System\Altium\Libraries 2014\WorldSemi\Datasheets\Worldsemi_WS2812B-2020.pdf", ComponentLink2Description="datasheet (online)", ComponentLink2URL=https://datasheet.lcsc.com/lcsc/2012110135_Worldsemi-WS2812B-2020_C965555.pdf, Manufacturer Part Number=WS2812B-2020, VDD=3.7-5.3, Vih=2.7, Vil=-0.3
D5: "USB TVS and ESD protection diodes", Breakdown Voltage=6V, Capacitance=16pF, Case/Package=SOT, Leakage Current=100nA, Manufacturer="NXP Semiconductors", Manufacturer Part Number=PRTR5V0U2X,215, Max Breakdown Voltage=9V, Max Operating Temperature=85°C, Max Reverse Leakage Current=100uA, Min Operating Temperature=-40°C, Package Quantity=1, Power Line Protection=Yes, Reverse Standoff Voltage=5.5V, Supplier Part Number 1=1727-3884-1-ND, ComponentLink8Description="NXP datasheet", ComponentLink8URL=http://www.farnell.com/datasheets/109718.pdf?src-supplier=Farnell, Contact Plating=Tin, Depth=1.4mm, Direction=Unidirectional, ESD Protection=Yes, Height=1.1mm, Lead Free="Lead Free", Length=3mm, Min Breakdown Voltage=6V, Mount="Surface Mount", Number of Bidirectional Channels=2, Number of Channels=2, Number of Elements=1, Number of Pins=4, Packaging="Tape and Reel", Polarity=Bidirectional,Unidirectional, Pricing 1="1=0.55, 10=0.47, 100=0.3507, 500=0.27552, 1000=0.2129 (USD)", Radiation Hardening=No, REACH SVHC="No SVHC", Reverse Breakdown Voltage=6V, Stock 1=109808, Supplier 1=Digi-Key, Supplier 2=Farnell, Supplier 3=RSComponents, Supplier 4=Mouser, Supplier Part Number 2=2371119, Supplier Part Number 3=725-8720, Supplier Part Number 4=771-PRTR5V0U2X-T/R, Termination=SMD/SMT, Weight=0.001lb, Width=1.4mm, Working Voltage=5.5V
D6: library part LTST-S220KFKT, "LED ORANGE CLEAR SMD R/A", Case/Package=SMD/SMT, Color=Orange,Yellow, Forward Current=20mA, Forward Voltage=2V, Illumination Color=Orange, Lens Color=Colorless, Manufacturer 1="Vishay Lite-On", Max Operating Temperature=85°C, Min Operating Temperature=-55°C, Package Quantity=4000, Power Dissipation=75mW, Reverse Voltage=5V, Supplier Part Number 1=160-2031-1-ND, Category=LEDs, ComponentLink1Description="datasheet (online)", ComponentLink1URL=https://optoelectronics.liteon.com/upload/download/DS22-2000-136/LTST-S220KFKT.pdf, ComponentLink2Description="datasheet (offline)", ComponentLink2URL="Y:\System\Altium\Libraries 2014\Lite-On\datasheets\LTST-S220KFKT.pdf", Depth=0.6mm, Dominant Wavelength=605nm, Height=0.6mm, Length=2.1mm, Lens Style=Clear,Diffused,Colorless,Rectangular, Lens Transparency=Clear, Luminous Intensity=90mcd, Manufacturer Part Number 1=LTST-S220KFKT, Mount="Surface Mount", Number of Elements=1, Number of LEDs=1, Number of Pins=2, Packaging="Tape and Reel", Power Rating=75mW, Pricing 1="1=0.23000, 10=0.12400, 100=0.05750, 500=0.05310, 1000=0.04160, 2000=0.04071 (USD)", Radiation Hardening=No, RoHS=Yes, RoHS Compliant=Yes, Series=-, Stock 1=4947, Supplier 1=Digi-Key, Supplier 2=RSComponents, Supplier 3=Mouser, Supplier Part Number 2=6921186P, Supplier Part Number 3=859-LTST-S220KFKT, Test Current=20mA, Viewing Angle=130°, Wavelength=611nm, Width=1mm
D7: "DIODE ARRAY SCHOTTKY 30V SOT23", Manufacturer=Nexperia, Manufacturer Part Number=BAT54S,235, Supplier Part Number 1=1727-1868-1-ND, Category="Rectifier Diodes", ComponentLink1Description="NXP datasheet online", ComponentLink1URL=https://assets.nexperia.com/documents/data-sheet/BAT54_SER.pdf, Pricing 1="1=0.13000, 10=0.11900, 100=0.05610, 500=0.03326, 1000=0.02185, 5000=0.02138 (USD)", RoHS=No, Stock 1=14011, Supplier 1=Digi-Key, Supplier 2=Mouser, Supplier 3=RSComponents, Supplier Part Number 2=771-BAT54S235, Supplier Part Number 3=1707990
D8 D9 D10 D12 D13 D14: "TVS DIODE 5.5V 18V CLP0603", Capacitance=0.4pF, Case Code (Imperial)=0201, Case Code (Metric)=0603, Clamping Voltage=18V, Manufacturer="Vishay Semiconductors", Max Operating Temperature=150°C, Min Breakdown Voltage=6V, Min Operating Temperature=-55°C, Peak Pulse Current=2.5A, Peak Pulse Power=45W, Power Line Protection=No, Resistor Type=Zener, Reverse Standoff Voltage=5.5V, Supplier Part Number 1=VBUS05B1-SD0-G4-08GICT-ND, Case/Package=0201, Category="TVS Diodes", Checked By=?, ComponentLink2Description="Online datasheet", ComponentLink2URL=http://www.vishay.com/docs/85899/vbus05b1-sd0.pdf, Created By="D. Gakure", Direction=Bidirectional, Element Configuration=Single, Manufacturer Part Number=VBUS05B1-SD0-G4-08, Mount="Surface Mount", Number of Bidirectional Channels=1, Number of Pins=2, Packaging="Tape and Reel", Pricing 1="1=0.27000, 10=0.18500, 100=0.09020, 500=0.07524, 1000=0.05228, 2000=0.04531, 5000=0.04203 (USD)", Pricing 2="5=0.20800, 10=0.14000, 100=0.06340, 500=0.05020, 1000=0.04160, 5000=0.03300 (GBP)", Pricing 3="1=0.27000, 10=0.18500, 50=0.18500, 100=0.09300, 1000=0.03900, 10000=0.03400 (USD)", Pricing 4="1=0.17630, 10=0.14370, 25=0.14230, 100=0.07810, 250=0.07660, 500=0.06310, 15000=0.02980, 150000=0.02970, 1500000=0.02870, 7500000=0.02800 (USD)", RoHS=Yes, Stock 1=22028, Stock 2=13100, Stock 3=1209, Stock 4=719, Supplier 1=Digi-Key, Supplier 2=Farnell, Supplier 3=Mouser, Supplier 4="Arrow Electronics", Supplier Part Number 2=2932858, Supplier Part Number 3=78-VBUS05B1SD0-G4-08, Supplier Part Number 4=VBUS05B1-SD0-G4-08, Working Voltage=5.5V
FB1: "0603 1k@100MHz 0.8A chip", Case Code (Imperial)=0603, Case Code (Metric)=1608, Current Rating=800mA, DC Resistance (DCR)=300mR, Manufacturer=TDK, Manufacturer Part Number=MPZ1608S102ATA00, Package Quantity=4000, Supplier Part Number 1=445-8694-1-ND, Tolerance=25%, Case/Package=0603, ComponentLink2Description="datasheet online", ComponentLink2URL=https://www.mouser.co.uk/datasheet/2/400/eads_commercial_power_mpz1608_en-923650.pdf, ComponentLink3Description=datasheet, ComponentLink3URL="Y:\System\Altium\Libraries 2014\TDK\Datasheets\eads_commercial_power_mpz1608_en-923650.pdf", Core Material=Ferrite, Height=0.037inch, Impedance="1kR @ 100MHz", Length=0.063inch, Max DC Current=800mA, Mount="Surface Mount", Packaging="Tape and Reel", Pricing 1="1=0.1, 10=0.079, 25=0.0716, 50=0.0644, 100=0.0472, 250=0.03432, 500=0.03146, 1000=0.02717 (USD)", Stock 1=113542, Supplier 1=Digi-Key, Supplier 2=Mouser, Supplier Part Number 2=810-MPZ1608S102ATA00, Width=0.031inch
J1: library part HACK_CONNECT_MINI
J2: "USB4085 Series 20 V PCB Top Mount USB 2.0 Type C Receptacle", Manufacturer 1="Global Connector Technology", Supplier Part Number 1=2073-USB4085-GF-ACT-ND, Category="USB Connectors", ComponentLink2Description="Datasheet (online)", ComponentLink2URL=https://datasheet.ciiva.com/71788/usb4085-71788147.pdf?src-supplier=Digi-Key, Contact Material="Copper Alloy", Contact Plating=Gold, Gender=Receptacle, Manufacturer Part Number 1=USB4085-GF-A, Number of Positions=16, Orientation="Right Angle", Pricing 1="1=1.340000, 10=1.178000, 25=1.108800, 50=1.062600, 100=1.016400, 250=0.924000 (USD)", RoHS=Yes, Stock 1=17632, Supplier 1=Digi-Key, Supplier 2=Farnell, Supplier Part Number 2=2924867, USB Standard="USB 2.0"
J3 J4 J6: "3 pin jacdac edge connector 1.27mm pitch", Manufacturer Part Number=JACDAC_EDGE_CONNECTOR, Checked By=?, ComponentLink1Description="Yuliang JACDAC cable connector drawing online", ComponentLink1URL=https://github.com/microsoft/jacdac-mdk/blob/main/connector/JACDAC-Connector-by-Yuliang-2020-11-28.pdf, ComponentLink2Description="JACDAC PCB edge connector spec onlin", ComponentLink2URL=https://github.com/microsoft/jacdac-mdk/blob/main/connector/JACDAC_PCB_Edge_Connector_Drawing_JD-PEC-01_rev_01.pdf, Created By="D. Gakure", PCB Type="1.6mm FR4"
MH1 MH2 MH3: "Mounting Hole 5.0mm keepout, 3.0mm annualar ring and 2.1mm Drill PTH"
R1 R5 R6: library part RC0402FR-071ML, "RES SMD 1M OHM 1% 1/16W 0402", Case Code (Imperial)=0402, Case Code (Metric)=1005, Manufacturer=Yageo, Max Operating Temperature=155°C, Max Power Dissipation=63mW, Min Operating Temperature=-55°C, Resistance=1MR, Resistance Tolerance=1%, Resistor Type="Thick Film", Supplier Part Number 1=311-1.00MLRCT-ND, Temperature Coefficient=100ppm/°C, Voltage Rating=50V, Case/Package=0402, Category="Chip SMD Resistors", Checked By=?, ComponentLink1Description="Online datasheet", ComponentLink1URL=https://datasheet.ciiva.com/11808/0900766b80c66297-11808125.pdf, Construction=Rectangular, Created By="D. Gakure", Depth=0.5mm, Features="Moisture Resistant", Height=0.32mm, Lead Free="Lead Free", Length=1mm, Manufacturer Part Number=RC0402FR-071ML, Military Standard=Not, Number of Terminations=2, Packaging="Tape and Reel", Power Rating=63mW, Pricing 1="1=0.10000, 10=0.01600, 100=0.00640, 1000=0.00286, 2500=0.00248, 5000=0.00205 (USD)", Pricing 2="1=0.10000, 10=0.01200, 50=0.01200, 100=0.00400, 1000=0.00400, 10000=0.00300 (USD)", Pricing 3="10000=0.00290, 50000=0.00200 (GBP)", REACH SVHC=Unknown, RoHS=Yes, RoHS Compliant=Yes, Series=RC, Size Code=0402, Stock 1=7856490, Stock 2=1194490, Stock 3=1530000, Supplier 1=Digi-Key, Supplier 2=Mouser, Supplier 3=Farnell, Supplier Part Number 2=603-RC0402FR-071ML, Supplier Part Number 3=2421892, Technology="THICK FILM", Termination=SMD/SMT, Tolerance=1%
R2 R7 R8: library part RC0402FR-0730KL, "YAGEO - RC0402FR-0730KL - RES, 30K, 1%, 0.063W, 0402, THICK FILM", Case Code (Imperial)=0402, Case Code (Metric)=1005, Manufacturer 1=Yageo, Max Operating Temperature=155°C, Max Power Dissipation=63mW, Min Operating Temperature=-55°C, Power Rating=62.5mW, Resistance=30kR, Resistance Tolerance=1%, Resistor Type="Thick Film", Supplier Part Number 1=311-30.0KLRCT-ND, Temperature Coefficient=100ppm/°C, Voltage Rating=50V, Case/Package=0402, Category="Chip SMD Resistors", ComponentLink1Description=https://datasheet.ciiva.com/7849/1018594-7849957.pdf?src-supplier=Element14, ComponentLink1URL=https://datasheet.ciiva.com/7849/1018594-7849957.pdf?src-supplier=Element14, ComponentLink2Description=https://datasheet.ciiva.com/46394/1018594-46394938.pdf?src-supplier=Element14, ComponentLink2URL=https://datasheet.ciiva.com/46394/1018594-46394938.pdf?src-supplier=Element14, ComponentLink3Description=https://datasheet.ciiva.com/12577/pyu-rc0402-51-rohs-l-6-r-12577743.pdf?src-supplier=Mouser, ComponentLink3URL=https://datasheet.ciiva.com/12577/pyu-rc0402-51-rohs-l-6-r-12577743.pdf?src-supplier=Mouser, Construction=Rectangular, Depth=0.5mm, Features="Moisture Resistant", Height=0.35mm, Lead Free="Lead Free", Length=1mm, Manufacturer Part Number 1=RC0402FR-0730KL, Military Standard=Not, Number of Terminations=2, Packaging="Tape and Reel", Pricing 1="1=0.10000, 10=0.01600, 100=0.00660, 1000=0.00299, 2500=0.00259, 5000=0.00214 (USD)", REACH SVHC=Unknown, RoHS=Yes, RoHS Compliant=Yes, Series=RC, Size Code=0402, Supplier 1=Digi-Key, Supplier 2=Farnell, Supplier 3=Mouser, Supplier Part Number 2=1458778RL, Supplier Part Number 3=603-RC0402FR-0730KL, Termination=SMD/SMT, Tolerance=1%, Voltage Rating (DC)=50V, Weight=2.3E-05oz, Width=0.5mm
R3 R4: "RES SMD 5.1K OHM 5% 1/16W 0402", Case Code (Imperial)=0402, Case Code (Metric)=1005, Manufacturer=Yageo, Max Operating Temperature=155°C, Max Power Dissipation=63mW, Min Operating Temperature=-55°C, Power Rating=62.5mW, Resistance=5.1kR, Resistance Tolerance=5%, Resistor Type="Thick Film", Supplier Part Number 1=311-5.1KJRCT-ND, Temperature Coefficient=100ppm/°C, Voltage Rating=50V, Case/Package=0402, Category="Chip SMD Resistors", Checked By=?, ComponentLink2Description="Onnline datasheet", ComponentLink2URL=https://datasheet.ciiva.com/16740/pyu-rc0402-51-rohs-l-6-r-16740925.pdf, Construction=Rectangular, Created By="D. Gakure", Depth=0.5mm, Features="Moisture Resistant", Height=0.35mm, Lead Free="Lead Free", Length=1mm, Manufacturer Part Number=RC0402JR-075K1L, Military Standard=Not, Number of Terminations=2, Packaging="Tape and Reel", Pricing 1="1=0.10000, 10=0.01300, 100=0.00520, 1000=0.00233, 2500=0.00202, 5000=0.00167 (USD)", Pricing 2="1=0.10000, 25=0.01000, 100=0.00400, 250=0.00400, 500=0.00300, 1000=0.00300 (USD)", Pricing 3="1=0.10000, 10=0.01000, 50=0.01000, 100=0.00400, 1000=0.00300, 10000=0.00200 (USD)", Pricing 4="10=0.00910, 100=0.00390, 500=0.00320, 2500=0.00240, 5000=0.00210, 10000=0.00190, 50000=0.00150 (GBP)", Pricing 5="10000=0.00270 (GBP)", REACH SVHC="No SVHC", RoHS=Yes, RoHS Compliant=Yes, Series=RC, Size Code=0402, Stock 1=1270619, Stock 2=1265, Stock 3=100817, Stock 4=68890, Stock 5=1265, Supplier 1=Digi-Key, Supplier 2=Newark, Supplier 3=Mouser, Supplier 4=Farnell, Supplier 5=Farnell, Supplier Part Number 2=68R0016, Supplier Part Number 3=603-RC0402JR-075K1L, Supplier Part Number 4=3495714, Supplier Part Number 5=1799293, Termination=SMD/SMT, Tolerance=5%, Voltage Rating (DC)=50V, Weight=2.3E-05oz, Width=0.5mm
R13: "RES SMD 1K OHM 1% 1/16W 0402", Case Code (Imperial)=0402, Case Code (Metric)=1005, Manufacturer=Yageo, Max Operating Temperature=155°C, Min Operating Temperature=-55°C, Power Rating=62.5mW, Resistance=1kR, Resistor Type="Thick Film", Supplier Part Number 1=311-1.00KLRDKR-ND, Temperature Coefficient=100ppm/°C, Tolerance=1%, Voltage Rating=50V, Case/Package=0402, Category=Resistors, Checked=?, ComponentLink2Description="Online datasheet", ComponentLink2URL=https://datasheet.ciiva.com/12666/pyu-rc0402-51-rohs-l-6-r-12666741.pdf, Created=D.G, Depth=0.5mm, Height=0.32mm, Lead Free="Lead Free", Length=1mm, Manufacturer Part Number=RC0402FR-071KL, Military Standard=Not, Number of Pins=2, Packaging="Tape and Reel", Pricing 1="1=0.10000, 10=0.01400, 100=0.00580, 1000=0.00262, 2500=0.00228, 5000=0.00188 (USD)", Pricing 2="1=0.10000, 10=0.01200, 100=0.00400, 1000=0.00400, 2500=0.00400, 10000=0.00300 (USD)", Pricing 3="1=0.08130, 25=0.01210, 100=0.01120, 250=0.01030, 500=0.00900 (GBP)", REACH SVHC=Unknown, RoHS=Yes, Stock 1=37591306, Stock 2=11912978, Stock 3=29900, Supplier 1=Digi-Key, Supplier 2=Mouser, Supplier 3=Farnell, Supplier Part Number 2=603-RC0402FR-071KL, Supplier Part Number 3=2132441, Termination=SMD/SMT, Voltage Rating (DC)=50V, Width=0.5mm
R14: "RES SMD 220 OHM 1% 1/16W 0402", Case Code (Imperial)=0402, Case Code (Metric)=1005, Manufacturer=Yageo, Max Operating Temperature=155°C, Max Power Dissipation=63mW, Min Operating Temperature=-55°C, Package Quantity=1, Power Rating=62.5mW, Resistance=220R, Resistor Type="Thick Film", Supplier Part Number 1=311-220LRCT-ND, Temperature Coefficient=100ppm/°C, Tolerance=1%, Voltage Rating=50V, Case/Package=0402, Category=Resistors, Checked=?, ComponentLink1Description=https://datasheet.ciiva.com/11819/0900766b80c66297-11819466.pdf?src-supplier=RSComponents, ComponentLink1URL=https://datasheet.ciiva.com/11819/0900766b80c66297-11819466.pdf?src-supplier=RSComponents, ComponentLink2Description=https://datasheet.ciiva.com/2453/pyu-r-int-thick-7-2453460.pdf?src-supplier=Digi-Key, ComponentLink2URL=https://datasheet.ciiva.com/2453/pyu-r-int-thick-7-2453460.pdf?src-supplier=Digi-Key, ComponentLink3Description=https://datasheet.ciiva.com/2453/pyu-r-int-thick-7-2453461.pdf?src-supplier=Digi-Key, ComponentLink3URL=https://datasheet.ciiva.com/2453/pyu-r-int-thick-7-2453461.pdf?src-supplier=Digi-Key, ComponentLink4Description=https://datasheet.ciiva.com/2453/pyu-r-int-thick-7-2453462.pdf?src-supplier=Digi-Key, ComponentLink4URL=https://datasheet.ciiva.com/2453/pyu-r-int-thick-7-2453462.pdf?src-supplier=Digi-Key, ComponentLink5Description=https://datasheet.ciiva.com/16746/pyu-rc0402-51-rohs-l-6-r-16746831.pdf?src-supplier=Future+Electronics, ComponentLink5URL=https://datasheet.ciiva.com/16746/pyu-rc0402-51-rohs-l-6-r-16746831.pdf?src-supplier=Future+Electronics, Created=D.G, Depth=0.5mm, Features="Moisture Resistant", Height=0.016inch, Lead Free="Lead Free", Length=1mm, Manufacturer Part Number=RC0402FR-07220RL, Military Standard=Not, Number of Pins=2, Number of Terminations=2, Packaging="Tape and Reel", Pricing 1="1=0.10000, 10=0.01400, 100=0.00580, 1000=0.00262, 2500=0.00228, 5000=0.00188 (USD)", Pricing 2="1=0.10000, 10=0.01200, 100=0.00400, 1000=0.00400, 2500=0.00400, 10000=0.00300 (USD)", Pricing 3="1=0.08130, 25=0.01210, 100=0.01120, 250=0.01030, 500=0.00900 (GBP)", REACH SVHC="No SVHC", RoHS=Yes, Stock 1=1286042, Stock 2=324625, Stock 3=18234, Supplier 1=Digi-Key, Supplier 2=Mouser, Supplier 3=Farnell, Supplier Part Number 2=603-RC0402FR-07220RL, Supplier Part Number 3=2147864, Termination=SMD/SMT, Voltage Rating (DC)=50V, Width=0.02inch
SW1: library part EVQ-P42B3M, "Switch Tactile N.O. SPST Button J-Bend 0.02A 15VDC 1.6N SMD Embossed T/R", Actuator Color=Natural, Case/Package=SMD/SMT, Contact Resistance=100mR, Current Rating=20mA, Manufacturer 3=Panasonic, Max Operating Temperature=85°C, Max Voltage Rating (DC)=15V, Min Operating Temperature=-40°C, Operating Force=1.6N, Package Quantity=1, Supplier Part Number 1=P15502CT-ND, Voltage Rating (AC)=250V, Category="Tactile Switches", ComponentLink1Description="CIIVA datasheet", ComponentLink1URL=https://datasheet.ciiva.com/16439/atk0000ce18-16439727.pdf?src-supplier=Future+Electronics, ComponentLink2Description="datasheet (offline)", ComponentLink2URL="Y:\System\Altium\Libraries 2014\Panasonic\datasheets\EVQ-P4.pdf", Depth=3mm, Electrical Life=1000000Cycles, Illumination Type=Non-Illuminated, Length=6.2mm, Manufacturer Part Number=EVQ-P42B3M, Manufacturer Part Number 3=EVQ-P42B3M, Max Current Rating=20mA, Mechanical Life=1000000Cycles, Mount="Edge,Surface Mount", Orientation="Right Angle", Packaging="Tape and Reel", Pricing 3="10=0.78800 (USD)", Radiation Hardening=No, RoHS=Yes, RoHS Compliant=Yes, Series=EVQP4, Size=3.5mm, Stock 3=310, Supplier 1=Digi-Key, Supplier 2=Mouser, Supplier 3=RSComponents, Supplier Part Number 2=667-EVQ-P42B3M, Supplier Part Number 3=1250217, Switch Function=Off-Mom, Switch Travel=0.25mm, Termination=J-Bend, Throw Configuration=SPST, Voltage Rating (DC)=15V
TP2 TP3 TP4 TP5 TP6: "Test Point"
U1: library part NCP114ASN330T1G, "ON SEMICONDUCTOR - NCP114ASN330T1G - LDO Voltage Regulator, Fixed, 1.7 V to 5.5 V in, 3.3 V/300 mA out, 150 mV drop, TSOP-5", Case/Package=SOT-23-5, Dropout Voltage=225mV, Manufacturer="ON Semiconductor", Max Input Voltage=5.5V, Max Operating Temperature=85°C, Min Operating Temperature=-40°C, Min Output Voltage=3.3V, Output Current=300mA, Power Supply Rejection Ratio (PSRR)=75dB, Quiescent Current=95uA, Supplier Part Number 1=NCP114ASN330T1GOSCT-ND, Category="Voltage Regulators - Linear", Checked=?, ComponentLink3Description="On Semi datasheet online", ComponentLink3URL=http://www.onsemi.com/pub/Collateral/NCP114-D.PDF, Created=DG, Lead Free="Lead Free", Manufacturer Part Number=NCP114ASN330T1G, Mount="Surface Mount", Number of Regulators=1, Output Configuration=Positive, Output Type=Fixed, Packaging="Cut Tape", Pricing 1="1=0.33000, 10=0.24900, 25=0.21760, 100=0.12440, 250=0.11664, 500=0.09330, 1000=0.07153 (USD)", RoHS=No, Stock 1=32529, Supplier 1=Digi-Key, Supplier 2=RSComponents, Supplier 3=Mouser, Supplier Part Number 2=1263178, Supplier Part Number 3=863-NCP114ASN330T1G
U2 U3 U5: "POWER LOAD SWITCH, HIGH SIDE, SOT-23-6; Power Load Switch Type:High Side; Input Voltage:6.5V; Current Limit:1.7A; On State Resistance:0.085ohm; Distribution Switch Case Style:SOT-23; No. of Pins:6; Thermal Protection:Yes; On / Enable;RoHS Compliant: Yes", Case/Package=SOT-23, Manufacturer 1="Texas Instruments", Manufacturer Part Number 1=TPS2553DBVR, Max Input Voltage=6.5V, Max Operating Temperature=85°C, Max Power Dissipation=625mW, Min Input Voltage=2.5V, Min Operating Temperature=-40°C, On-State Resistance=85mR, Output Current=1.5A, Package Quantity=1, Supplier Part Number 1=296-32464-1-ND, Category="Hot Swap Controllers", ComponentLink1Description=https://datasheet.ciiva.com/15108/getdatasheetpartid-297517-15108509.pdf?src-supplier=Verical, ComponentLink1URL=https://datasheet.ciiva.com/15108/getdatasheetpartid-297517-15108509.pdf?src-supplier=Verical, Lead Free="Lead Free", Max Supply Voltage=6.5V, Min Supply Voltage=2.5V, Number of Outputs=1, Number of Pins=6, Packaging="Tape and Reel", Pricing 1="1=1.20000, 10=1.07100, 25=1.01640, 100=0.78050, 250=0.68972, 500=0.65340, 1000=0.50820 (USD)", Radiation Hardening=No, REACH SVHC="No SVHC", RoHS=Yes, Stock 1=14713, Supplier 1=Digi-Key, Supplier 2=Farnell, Supplier 3=Mouser, Supplier Part Number 2=3124082, Supplier Part Number 3=595-TPS2553DBVR, Weight=0.00127oz
U4: library part BM833, "Fanstel Nordic nRF52833 module", Manufacturer 1=Fanstel, Supplier Part Number 1=1914-BM833CT-ND, Category="RF Receivers, Transceivers", ComponentLink1Description="Datasheet (offline)", ComponentLink1URL="Y:\System\Altium\Libraries 2014\Fanstel\Datasheets\BM833_datasheets.pdf", ComponentLink2Description="Datasheet (online)", ComponentLink2URL=https://www.fanstel.com/s/BM833_datasheets-rs9l.pdf, Manufacturer Part Number 1=BM833, Pricing 1="1=10.43000, 10=9.55900, 25=8.69000, 100=7.82100, 250=7.16924, 500=6.51750 (USD)", RoHS=No, Stock 1=879, Supplier 1=Digi-Key, Supplier 2=Mouser, Supplier Part Number 2=308-BM833

## Via types
v1: diameter 23.62, hole 11.81, Top Layer to Bottom Layer, tented both sides, 44 vias

## Nets (pads, with @x,y where several pads share a name; then routed paths per layer and width w, separated by ;. In a path a pad name is that pad's centre, name@x,y a point inside that pad or via, vN(x,y) a via of type N, cw(c..) or ccw(c..) an arc to the next point about the centre after c; other vN are vias at no path point)
3V3: C2.2 C7.2 D7.2 J1.1 U1.5 U4.14 U4.28 U4.56 | length 1167.5
  Top Layer w13.39: J1.1 92.53,148.34 92.53,194.94 100.38,202.78 125.94,202.78 132.75,209.59 132.75,277.59 107.35,302.98 U1.5 100.18,304.25 100.18,346.96 C2.2 98.92,525.33 106.76,533.17 274.82,533.17 ; D7.2 274.82,560.84 274.82,533.17 ; C7.2 284.2,523.79 274.82,533.17 ; U4.56 438.35,391.19 ; U4.14 438.35,391.19 ; 274.82,533.17 U4.28 323.83,371.7 418.86,371.7 438.35,391.19
\I\L\I\M\_\F\A\U\L\T\0\: C5.2 R1.2 U2.3 U2.4 U4.7 | length 1186.9
  Top Layer w7.87: U2.4 U2.3 -304.7,466.97 -273.91,497.77 -269.54,497.77 C5.2 -263.19,503.23 -228.63,503.23 R1.2 -227.75,503.23 -63.08,503.23 v1(-62.64,503.67) ; U4.7 589.08,272.39 v1(589.08,273.28)
  Bottom Layer w7.87: v1(-62.64,503.67) 150.68,503.67 191.92,462.43 320.77,462.43 372.33,410.88 482.83,410.88 566.44,327.27 566.44,295.93 v1(589.08,273.28)
\I\L\I\M\_\F\A\U\L\T\1\: C16.2 R5.2 U3.3 U3.4 U4.55 | length 1391.5
  Top Layer w6: R5.2@-184.4,778.65 v1(-184.4,804.04) ; U4.55 526.18,369.54 541.97,353.74 567.47,353.74 583.53,369.8 583.53,377.38 v1(586.91,380.75)
  Top Layer w13.39: U3.4 U3.3 -266.75,747.27 -255.18,747.27 -223.31,779.14 C16.2 -221.83,778.65 R5.2@-184.4,778.65
  Bottom Layer w6: v1(-184.4,804.04) -22.1,804.04 46.97,734.97 204.51,734.97 238.24,768.71 281.09,768.71 516.23,533.57 516.23,505.12 505.99,494.88 505.99,461.66 v1(586.91,380.75)
\I\L\I\M\_\F\A\U\L\T\2\: C17.2 R6.2 U4.47 U5.3 U5.4 | length 1131.9
  Top Layer w7.87: R6.2 335.55,858.3 357.91,858.3 v1(360.93,855.29) ; U4.47 v1(460.14,217.96)
  Top Layer w13.39: U5.4 U5.3 248.12,829.93 259.21,829.93 292.47,863.2 C17.2 R6.2@330.66,863.19
  Bottom Layer w7.87: v1(360.93,855.29) 420.5,795.71 420.5,714.79 609.75,525.54 609.75,264.72 587.88,242.85 485.03,242.85 v1(460.14,217.96)
CC1: J2.A5 R4.1 U4.11 | length 1348.3
  Top Layer w7.87: R4.1 -76.38,226.52 -76.38,196.29 v1(-75.6,195.51) ; v1(538.25,326.23) U4.11
  Bottom Layer w7.87: J2.A5 -341.08,124.04 -385.49,124.04 -405.39,104.14 -405.39,86.2 -370.07,50.88 -77.93,50.88 -54.72,74.08 -54.72,174.63 v1(-75.6,195.51) -13.32,257.79 411.58,257.79 480.02,326.23 v1(538.25,326.23)
CC2: J2.B5 R3.1 U4.12 | length 906.1
  Top Layer w7.87: v1(-111.85,194.7) R3.1 ; v1(403.02,278.46) 438.39,278.46 459.59,299.65 487.15,299.65 505.81,318.31 505.81,332.81 U4.12
  Bottom Layer w7.87: J2.B5 -192.14,119.44 -147.74,119.44 -127.83,139.35 -127.83,150.54 -111.85,166.53 v1(-111.85,194.7) -28.08,278.46 v1(403.02,278.46)
GND: C1.1 C2.1 C3.1 C4.1 C5.1 C6.1 C7.1 C8.1 C9.1 C10.1 C11.1 C12.1 C13.1 C14.1 C15.1 C16.1 C17.1 D3.2 D5.1 D7.1 D8.2 D9.2 D10.2 D11.2 D12.2 D13.2 D14.2 D15.2 D16.2 J1.3 J2.A1 J2.A12 J2.B1 J2.B12 J3.2 J4.2 J6.2 MH3.1 R2.1 R3.2 R4.2 R7.1 R8.1 R13.1 SW1.2 U1.2 U2.2 U3.2 U4.1 U4.2 U4.3 U4.4 U4.5 U4.13 U4.15 U4.18 U4.19 U4.30 U4.45 U5.2 | length 7564.7
  Top Layer w6: C12.1 160.71,505.19 C12.1@167.55,498.34 ; v1@185.24,498.34 v1(187,496.58)
  Top Layer w13.38: C12.1@167.55,498.34 v1@185.24,498.34